# EAGLE board ARM_board_smd_layout (EAGLE 6.3), part 1 of 2
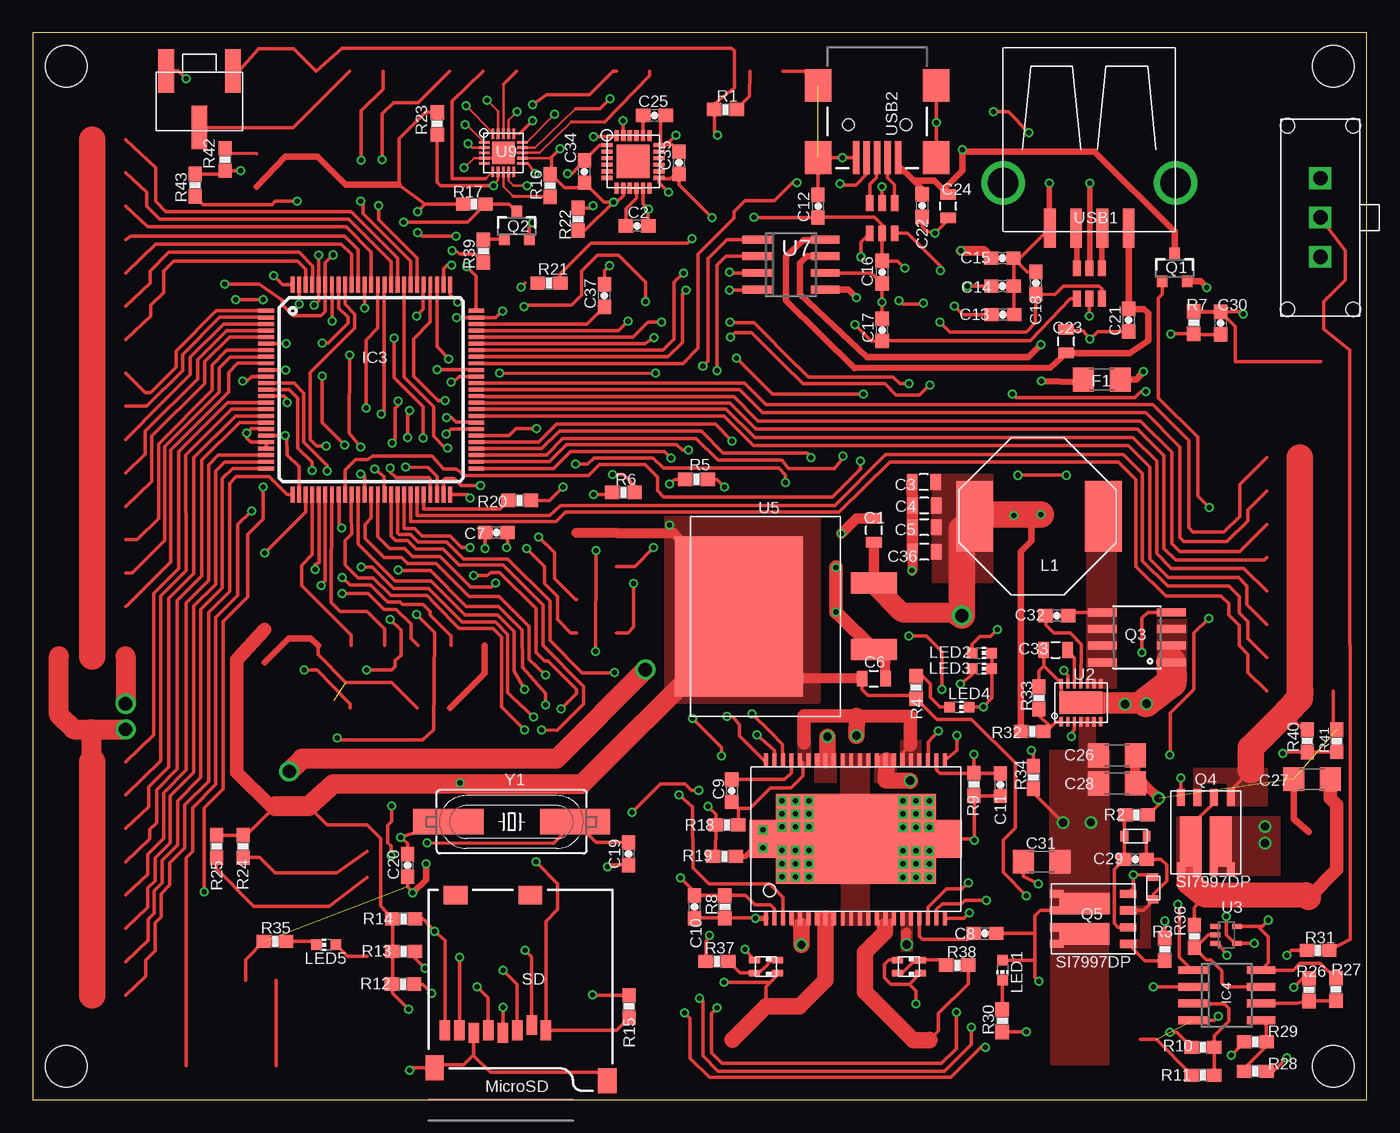
[diagram p0: board, top side]
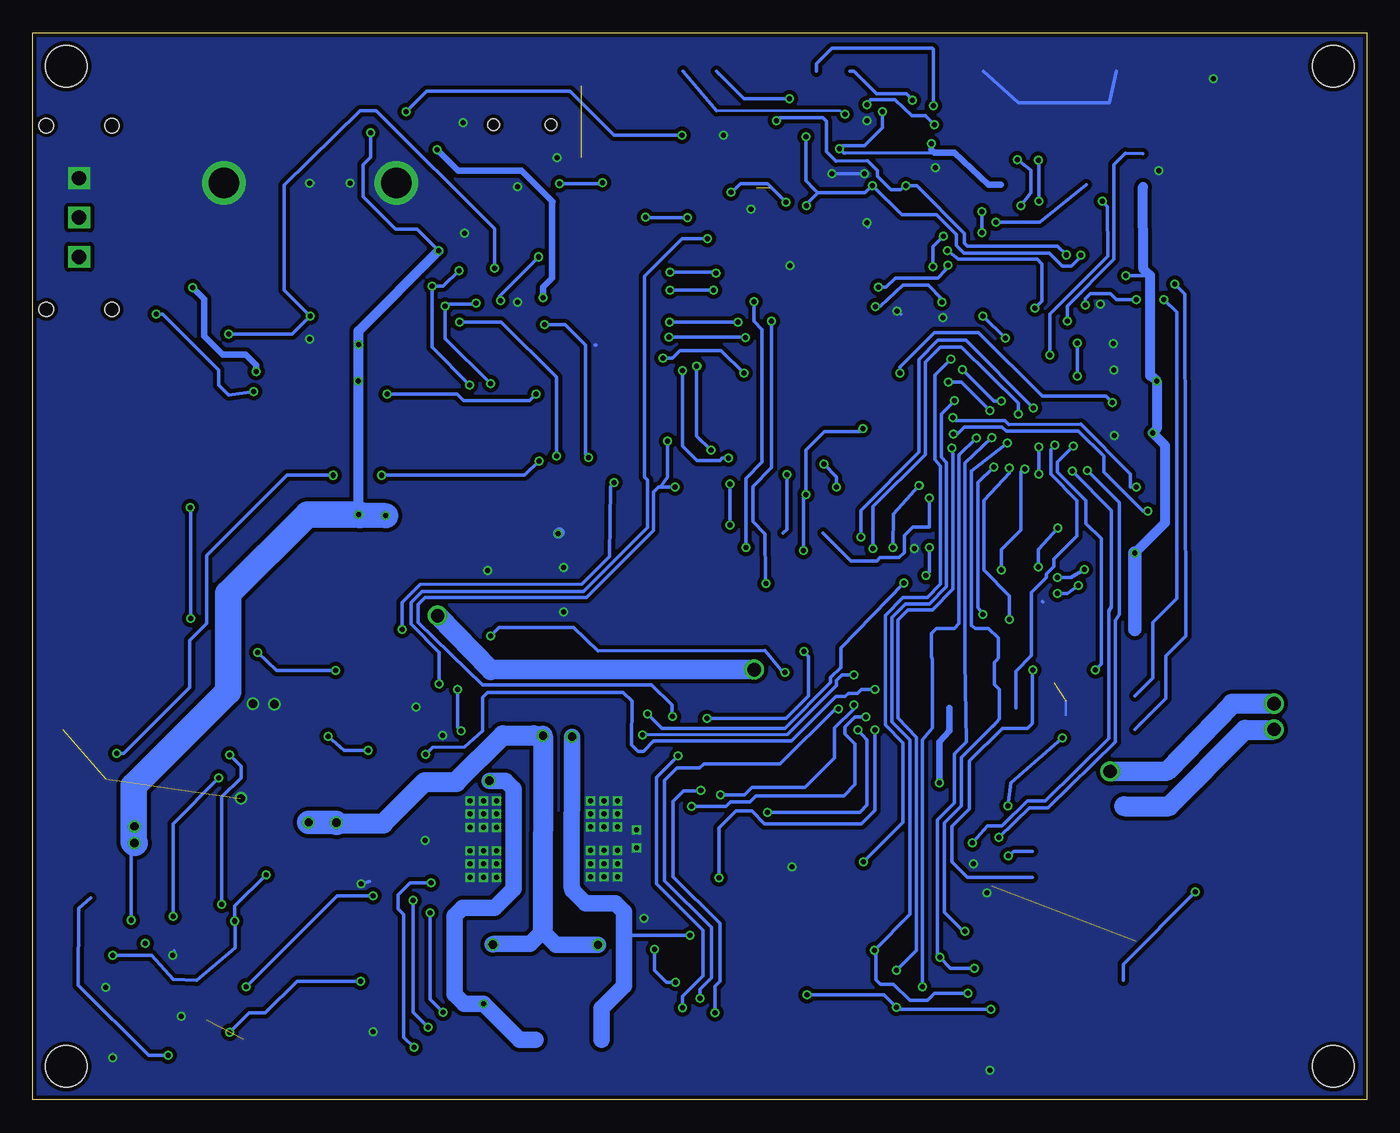
[diagram p1: board, bottom side, seen from below]

Size 101.6 x 81.28 mm. Coordinates in mm from the lower left corner, seen from the top.
Outline: 0,0 101.6,0 101.6,81.28 0,81.28 0,0
Copper layers (1*16): Top 0.035mm / dielectric 1.5mm / Bottom 0.035mm
Design rules "default": minimum track width 6mil, minimum drill 12mil, track to track 6mil, track to pad 6mil, pad to pad 6mil, via to via 6mil, smd to smd 0mil, copper to edge 10mil, drill to drill 10mil, minimum pad ring 10mil, minimum via ring 6mil, stop-mask expansion 2mil, vias tented up to drill 100mil, thermal gap 10mil
Holes 3.17 mm at 2.54,78.74 99.06,78.74 99.06,2.54 2.54,2.54

## Footprints (pad centres in the part's own frame; a part is rotated, then mirrored left to right if it is on the bottom)
0805 = smd 0.8 x 1.2: 1 -0.9,0; 2 0.9,0
0603-CAP = smd 1.1 x 1: 1 -0.85,0; 2 0.85,0
1206 = smd 1.6 x 1.8: 1 -1.4,0; 2 1.4,0
1206' = smd 1.6 x 1.8: 1 -0.13,2.54; 2 2.67,2.54
TQFP100 = smd 1.2 x 0.3: 1 -8,6; 2 -8,5.5; 3 -8,5; 4 -8,4.5; 5 -8,4; 6 -8,3.5; 7 -8,3; 8 -8,2.5; 9 -8,2; 10 -8,1.5; 11 -8,1; 12 -8,0.5; 13 -8,0; 14 -8,-0.5; 15 -8,-1; 16 -8,-1.5; 17 -8,-2; 18 -8,-2.5; 19 -8,-3; 20 -8,-3.5; 21 -8,-4; 22 -8,-4.5; 23 -8,-5; 24 -8,-5.5; 25 -8,-6; 51 8,-6; 52 8,-5.5; 53 8,-5; 54 8,-4.5; 55 8,-4; 56 8,-3.5; 57 8,-3; 58 8,-2.5; 59 8,-2; 60 8,-1.5; 61 8,-1; 62 8,-0.5; 63 8,0; 64 8,0.5; 65 8,1; 66 8,1.5; 67 8,2; 68 8,2.5; 69 8,3; 70 8,3.5; 71 8,4; 72 8,4.5; 73 8,5; 74 8,5.5; 75 8,6 | smd 0.3 x 1.2: 26 -6,-8; 27 -5.5,-8; 28 -5,-8; 29 -4.5,-8; 30 -4,-8; 31 -3.5,-8; 32 -3,-8; 33 -2.5,-8; 34 -2,-8; 35 -1.5,-8; 36 -1,-8; 37 -0.5,-8; 38 0,-8; 39 0.5,-8; 40 1,-8; 41 1.5,-8; 42 2,-8; 43 2.5,-8; 44 3,-8; 45 3.5,-8; 46 4,-8; 47 4.5,-8; 48 5,-8; 49 5.5,-8; 50 6,-8; 76 6,8; 77 5.5,8; 78 5,8; 79 4.5,8; 80 4,8; 81 3.5,8; 82 3,8; 83 2.5,8; 84 2,8; 85 1.5,8; 86 1,8; 87 0.5,8; 88 0,8; 89 -0.5,8; 90 -1,8; 91 -1.5,8; 92 -2,8; 93 -2.5,8; 94 -3,8; 95 -3.5,8; 96 -4,8; 97 -4.5,8; 98 -5,8; 99 -5.5,8; 100 -6,8
SO08 = smd 0.6 x 2.2: 1 -1.905,-2.6; 2 -0.635,-2.6; 3 0.635,-2.6; 4 1.905,-2.6; 5 1.905,2.6; 6 0.635,2.6; 7 -0.635,2.6; 8 -1.905,2.6
INDUCTOR = smd 2.8 x 5.4: P$1 0,0; P$2 9.8,0
CHIP-LED0603 = smd 0.8 x 0.8: A 0,-0.75; C 0,0.75
LED-0606 = smd 0.85 x 0.5: 1 0.875,0.5; 2 -0.875,0.5; 3 0.875,-0.5; 4 -0.875,-0.5
POT = smd 1.194 x 3.302: 1 -2.54,0; 2 0,4.318; 3 2.54,0
SOT23-3 = smd 0.8 x 0.9: 1 -0.95,-1; 2 0.95,-1; 3 0,1.1
SO08' = smd 0.61 x 2.21: 1 -1.905,-2.616; 2 -0.635,-2.616; 3 0.635,-2.616; 4 1.905,-2.616; 5 1.905,2.616; 6 0.635,2.616; 7 -0.635,2.616; 8 -1.905,2.616
POWERPAK = smd 1.27 x 0.61: 1 0,2.54; 2 0,1.27; 3 0,0; 4 0,-1.27 | smd 1.016 x 0.61: 5 5.461,-1.27; 6 5.461,0; 7 5.461,1.27; 8 5.461,2.54 | smd 3.81 x 1.651: 9 3.353,1.791; 10 3.353,-0.521
0603-RES = smd 1.1 x 1: 1 -0.85,0; 2 0.85,0
MICRO-SD-SOCKET-PP = smd 0.8 x 1.5: 1 -8.94,10.7; 2 -7.84,10.3; 3 -6.74,10.7; 4 -5.64,10.9; 5 -4.54,10.7; 6 -3.44,10.9; 7 -2.34,10.7; 8 -1.24,10.7 | smd 1.8 x 1.4: CD1 -2.05,0.4; CD2 -7.75,0.4 | smd 1.4 x 1.9: GND1 -13.6,14.55; GND3 -0.45,13.55
SW = drill 1.1 square: P$1 0,0; P$2 3,0; P$3 -3,0 | hole 1.1: -7,2.5; -7,-2.5; 7,-2.5; 7,2.5
HSOP44 = smd 1.05 x 0.3: P$1 -6.05,6.85; P$2 -6.05,6.2; P$3 -6.05,5.55; P$4 -6.05,4.9; P$5 -6.05,4.25; P$6 -6.05,3.6; P$7 -6.05,2.95; P$8 -6.05,2.3; P$9 -6.05,1.65; P$10 -6.05,1; P$11 -6.05,0.35; P$12 -6.05,-0.3; P$13 -6.05,-0.95; P$14 -6.05,-1.6; P$15 -6.05,-2.25; P$16 -6.05,-2.9; P$17 -6.05,-3.55; P$18 -6.05,-4.2; P$19 -6.05,-4.85; P$20 -6.05,-5.5; P$21 -6.05,-6.15; P$22 -6.05,-6.8; P$23 6,-6.8; P$24 6,-6.15; P$25 6,-5.5; P$26 6,-4.85; P$27 6,-4.2; P$28 6,-3.55; P$29 6,-2.9; P$30 6,-2.25; P$31 6,-1.6; P$32 6,-0.95; P$33 6,-0.3; P$34 6,0.35; P$35 6,1; P$36 6,1.65; P$37 6,2.3; P$38 6,2.95; P$39 6,3.6; P$40 6,4.25; P$41 6,4.9; P$42 6,5.55; P$43 6,6.2; P$44 6,6.85 | smd 6.85 x 12.2: P$45 0,0 | smd 2.9 x 2: P$46 0,7.1; P$47 0,-7.1
WDFN-14L = smd 0.25 x 0.7: 1 -1.5,-1.45; 2 -1,-1.45; 3 -0.5,-1.45; 4 0,-1.45; 5 0.5,-1.45; 6 1,-1.45; 7 1.5,-1.45; 8 1.5,1.45; 9 1,1.45; 10 0.5,1.45; 11 0,1.45; 12 -0.5,1.45; 13 -1,1.45; 14 -1.5,1.45 | smd 3.3 x 1.7: P$1 0,0
SC70 = smd 0.4 x 0.75: 1 -0.65,-0.825; 2 0,-0.825; 3 0.65,-0.825; 4 0.65,0.825; 5 -0.65,0.825
QFN-24_IMU = smd 0.838 x 0.318: 1 -1.975,1.25; 2 -1.975,0.75; 3 -1.975,0.25; 4 -1.975,-0.25; 5 -1.975,-0.75; 6 -1.975,-1.25; 13 1.975,-1.25; 14 1.975,-0.75; 15 1.975,-0.25; 16 1.975,0.25; 17 1.975,0.75; 18 1.975,1.25 | smd 0.318 x 0.838: 7 -1.25,-2.025; 8 -0.75,-2.025; 9 -0.25,-2.025; 10 0.25,-2.025; 11 0.75,-2.025; 12 1.25,-2.025; 19 1.25,1.975; 20 0.75,1.975; 21 0.25,1.975; 22 -0.25,1.975; 23 -0.75,1.975; 24 -1.25,1.975 | smd 2.54 x 2.54: DIE_PAD 0,0
D2PAK = smd 1.6 x 3.505: GND -2.54,-2.54; VIN 2.54,-2.54 | smd 12.192 x 9.754: VOUT 0,7.722
SOT23-6L = smd 1.2 x 0.6: P$1 -1.1,0.9; P$2 -1.1,-0.05; P$3 -1.1,-1; P$4 1.2,-1; P$5 1.2,-0.05; P$6 1.2,0.9
QFN-UT-20 = smd 0.203 x 0.787: P$1 0,-1.45; P$2 0.4,-1.45; P$3 0.8,-1.45; P$4 -0.4,-1.45; P$5 -0.8,-1.45; P$6 0,1.45; P$7 0.4,1.45; P$8 0.8,1.45; P$9 -0.4,1.45; P$10 -0.8,1.45 | smd 0.787 x 0.203: P$11 -1.45,0; P$12 -1.45,-0.4; P$13 -1.45,-0.8; P$14 -1.45,0.4; P$15 -1.45,0.8; P$16 1.45,0; P$17 1.45,-0.4; P$18 1.45,-0.8; P$19 1.45,0.4; P$20 1.45,0.8 | smd 1.7 x 1.7: P$21 0,0
USB-A-S = smd 3 x 0.9: D+ 3.45,-1; D- 3.45,1; GND 3.45,-3; VBUS 3.45,3 | drill 2.311: GND@1 0,6.566; GND@2 0,-6.566
USB-MINIB = smd 2.5 x 0.5: D+ 2.5,0; D- 2.5,0.8; GND 2.5,-1.6; ID 2.5,-0.8; VBUS 2.5,1.6 | smd 2.5 x 2: MTN1 -3,4.5; MTN2 2.5,4.5; MTN3 -3,-4.5; MTN4 2.5,-4.5 | hole 0.9: 0,2.2; 0,-2.2
HC49UP = smd 5.334 x 1.93: 1 -4.826,0; 2 4.826,0
0603 = smd 0.6 x 0.8: P$1 1.7,0; P$2 0,0

## Placement (x,y rotation side)
C1  10u  [0805]  64.06,43.38 90 top
C2  0.1u  [0603-CAP]  46.02,66.57 0 top
C3  22u  [0805]  67.87,47.07 180 top
C4  22u  [0805]  67.89,45.26 180 top
C5  22u  [0805]  67.89,43.61 180 top
C6  10u  [0805]  64.06,32.08 0 top
C7  2.2u  [0603-CAP]  35.31,43.21 0 top
C8  0.1u  [0603-CAP]  72.52,12.67 180 top
C9  0.1u  [0603-CAP]  53.24,23.55 270 top
C10  1u  [0603-CAP]  50.39,14.71 270 top
C11  1u  [0603-CAP]  73.71,24 270 top
C12  0.1u  [0603-CAP]  59.82,68.07 90 top
C13  47p  [0603-CAP]  73.89,59.82 0 top
C14  47p  [0603-CAP]  73.86,61.98 0 top
C15  0.1u  [0603-CAP]  73.84,64.11 0 top
C16  0.1u  [0603-CAP]  64.69,63.04 270 top
C17  47p  [0603-CAP]  64.69,58.65 90 top
C18  47p  [0603-CAP]  76.4,62.23 90 top
C19  22p  [0603-CAP]  45.36,18.75 270 top
C20  22p  [0603-CAP]  28.55,17.86 90 top
C21  0.1u  [0603-CAP]  83.46,59.39 270 top
C22  0.1u  [0603-CAP]  67.74,68.12 90 top
C23  10u  [0805]  78.71,57.78 90 top
C24  10u  [0805]  69.72,68.07 90 top
C25  2.2n  [0603-CAP]  47.35,74.98 0 top
C26  10u  [1206]  82.58,26.24 0 top
C27  22u  [1206]  97.43,24.43 180 top
C28  10u  [1206]  82.58,24.1 0 top
C29  0.1u  [0603-CAP]  83.97,18.31 180 top
C30  10n  [0603-CAP]  90.47,59.16 90 top
C31  22u  [1206]  76.83,18.14 180 top
C32  1u  [0603-CAP]  78,36.88 0 top
C33  10u  [0805]  77.9,34.26 0 top
C34  0.1uF  [0603-CAP]  42.01,70.71 90 top
C35  10n  [0603-CAP]  49.23,71.37 90 top
C36  22u  [0805]  67.89,41.76 180 top
C37  2.2u  [0603-CAP]  43.54,61.26 90 top
F1  POLYFUSE  [1206']  82.7,57.4 180 top
IC3  STM32F407VET  [TQFP100]  25.78,54.1 0 top
IC4  LM358D  [SO08]  90.96,7.98 270 top
L1  2.7u  [INDUCTOR]  81.53,44.45 180 top
LED1  RED  [CHIP-LED0603]  73.86,9.88 180 top
LED2  YELLOW  [CHIP-LED0603]  72.29,34.04 270 top
LED3  YELLOW  [CHIP-LED0603]  72.29,32.84 270 top
LED4  RED  [CHIP-LED0603]  70.59,29.92 270 top
LED5  YELLOW  [CHIP-LED0603]  22.35,11.81 90 top
LED6  LED_R/G  [LED-0606]  55.85,10.16 180 top
LED7  LED_R/G  [LED-0606]  66.73,10.16 180 top
POT  10K  [POT]  12.7,78.38 180 top
Q1  Si2301  [SOT23-3]  86.97,63.35 0 top
Q2  BC817  [SOT23-3]  36.86,66.55 0 top
Q3  FDS6670AS  [SO08']  84.1,35.23 90 top
Q4  SI7997DP  [POWERPAK]  88.7,23.04 270 top
Q5  SI7997DP  [POWERPAK]  83.44,14.43 180 top
R1  10  [0603-RES]  52.76,75.44 180 top
R2  100k  [0603-RES]  84.07,21.69 0 top
R3  100k  [0603-RES]  86.21,11.46 270 top
R4  220  [0603-RES]  67.28,31.42 270 top
R5  10k  [0603-RES]  50.55,47.27 180 top
R6  10k  [0603-RES]  44.98,46.28 180 top
R7  10k  [0603-RES]  88.42,59.21 270 top
R8  220  [0603-RES]  52.7,14.71 90 top
R9  220  [0603-RES]  71.68,24.03 90 top
R10  10k  [0603-RES]  89.13,4.01 180 top
R11  10k  [0603-RES]  89.13,1.88 0 top
R12  33k  [0603-RES]  28.19,8.81 0 top
R13  33k  [0603-RES]  28.24,11.3 0 top
R14  33k  [0603-RES]  28.24,13.79 0 top
R15  33k  [0603-RES]  45.42,7.11 90 top
R16  10k  [0603-RES]  39.4,69.65 90 top
R17  1k  [0603-RES]  33.63,68.22 0 top
R18  93.1k  [0603-RES]  52.88,20.95 180 top
R19  10k  [0603-RES]  52.68,18.54 0 top
R20  220  [0603-RES]  37.08,45.67 180 top
R21  220  [0603-RES]  39.32,62.2 180 top
R22  10k  [0603-RES]  41.53,67.08 270 top
R23  10k  [0603-RES]  30.81,74.37 90 top
R24  10k  [0603-RES]  16.03,19.3 90 top
R25  10k  [0603-RES]  14,19.3 90 top
R26  10k  [0603-RES]  97.21,8.38 270 top
R27  39k  [0603-RES]  99.26,8.41 90 top
R28  10k  [0603-RES]  93.12,2.18 0 top
R29  39k  [0603-RES]  93.12,4.42 0 top
R30  2k  [0603-RES]  73.84,6.02 90 top
R31  10k  [0603-RES]  97.89,11.38 0 top
R32  93.1k  [0603-RES]  76.12,28.07 180 top
R33  18k  [0603-RES]  76.63,30.61 270 top
R34  100k  [0603-RES]  76.23,24.56 270 top
R35  220  [0603-RES]  18.44,12.06 0 top
R36  10k  [0603-RES]  88.47,12.45 90 top
R37  2k  [0603-RES]  52.12,10.54 0 top
R38  2k  [0603-RES]  70.41,10.26 180 top
R39  1k  [0603-RES]  34.32,64.64 90 top
R40  93.1k  [0603-RES]  97.08,27.33 270 top
R41  10k  [0603-RES]  99.31,27.36 90 top
R42  10k  [0603-RES]  14.66,71.63 90 top
R43  10k  [0603-RES]  12.37,69.67 270 top
SD  USD-SOCKETNEW  [MICRO-SD-SOCKET-PP]  30.15,16 180 top
SW1  SW  [SW]  98.07,67.21 90 top
U1  MC33932  [HSOP44]  62.69,19.86 90 top
U2  RT7259  [WDFN-14L]  79.83,30.25 0 top
U3  NC7SZU04  [SC70]  90.91,12.57 270 top
U4  MPU-6050  [QFN-24_IMU]  45.72,71.48 0 top
U5  LD1086  [D2PAK]  61.52,36.83 90 top
U6  USBLC6-2  [SOT23-6L]  80.52,62.23 270 top
U7  LM3526  [SO08]  57.76,63.63 270 top
U8  USBLC6-2  [SOT23-6L]  64.74,67.21 270 top
U9  SX1505  [QFN-UT-20]  35.84,72.14 0 top
USB1  USB-A-S  [USB-A-S]  80.47,69.85 270 top
USB2  USB-MINIB-5PIN  [USB-MINIB]  64.31,74.27 270 top
Y1  24MHz  [HC49UP]  36.47,21.18 0 top
ZD1  15V  [0603]  84.84,20.09 180 top
ZD2  15V  [0603]  85.34,15.27 90 top

## Library data of the parts
C1-C37 Q1-Q3 R1-R43 SD U3 USB2 Y1 = SparkFun
F1 L1 LED6 LED7 POT Q4 Q5 SW1 U2 U4 U5 U9 ZD1 ZD2 = r_cubed
IC3 U1 U6-U8 = new_parts
IC4 = linear
LED1-LED5 = led
USB1 = con-usb-2

## Nets
5V: C1.1 C3.1 C4.1 C5.1 C15.1 C36.1 F1.2 IC4.8 L1.P$2 POT.1 Q4.7 Q4.8 Q4.9 R1.2 R27.2 R32.2 U3.5 U5.VIN U7.7
+3V3: C6.1 C12.1 C16.1 C30.1 C34.1 C35.1 IC3.11 IC3.19 IC3.21 IC3.22 IC3.28 IC3.50 IC3.75 IC3.100 IC4.2 R4.2 R5.2 R6.1 R7.2 R12.1 R13.1 R14.1 R15.2 R16.2 R17.1 R22.2 R23.2 R24.2 R25.2 SD.4 U4.8 U4.13 U5.VOUT U6.P$5 U8.P$5 U9.P$7 U9.P$14 U9.P$17
ANALOG0: IC3.26
ANALOG1: IC3.25
ANALOG2: IC3.24
ANALOG3: IC3.23
ANALOG4: IC3.18
ANALOG5: IC3.17
ANALOG6: IC3.16
ANALOG7: IC3.15
BAT_SENSE: IC3.33 R18.2 R19.1
BOOT0: IC3.94 R42.2
BOOT1: IC3.37 R43.2
BTN0: IC3.57
BTN1: IC3.58
BUZZER: IC3.89 R39.1
DIGITAL0: IC3.9
DIGITAL1: IC3.8
DIGITAL2: IC3.7
DIGITAL3: IC3.5
DIGITAL4: IC3.4
DIGITAL5: IC3.3
DIGITAL6: IC3.2
DIGITAL7: IC3.1
DIGITAL8: IC3.98
DIGITAL9: IC3.97
DIGITAL10: IC3.91
DIGITAL11: IC3.90
DIGITAL12: IC3.88
DIGITAL13: IC3.85
DIGITAL14: IC3.84
GND: C1.2 C2.2 C3.2 C4.2 C5.2 C6.2 C7.1 C10.2 C11.2 C12.2 C13.2 C14.2 C15.2 C16.2 C17.2 C18.2 C19.2 C20.1 C21.2 C22.1 C23.2 C24.1 C25.2 C26.2 C27.2 C28.2 C31.2 C33.1 C34.2 C35.2 C36.2 C37.2 IC3.6 IC3.10 IC3.20 IC3.27 IC3.74 IC3.99 IC4.4 LED2.C LED3.C LED4.C POT.3 Q2.2 Q3.1 Q3.2 Q3.3 R2.2 R8.1 R9.1 R11.1 R19.2 R26.1 R28.2 R30.1 R33.1 R35.1 R41.2 R42.1 R43.1 SD.6 SD.GND1 SD.GND3 SW1.P$2 U1.P$1 U1.P$10 U1.P$11 U1.P$12 U1.P$13 U1.P$23 U1.P$32 U1.P$33 U1.P$34 U1.P$35 U1.P$45 U1.P$46 U1.P$47 U2.14 U2.P$1 U3.3 U4.1 U4.9 U4.11 U4.18 U5.GND U6.P$2 U7.6 U8.P$2 U9.P$8 U9.P$12 U9.P$18 U9.P$21 USB1.GND USB1.GND@1 USB1.GND@2 USB2.GND USB2.MTN1 USB2.MTN2 USB2.MTN3 USB2.MTN4
I2C1_SCL: IC3.95 R23.1 U4.23 U9.P$4
I2C1_SDA: IC3.96 R22.1 U4.24 U9.P$2
I2C2_SCL/USART3_TX: IC3.47 R25.1
I2C2_SDA/USART3_RX: IC3.48 R24.1
LCD_E: IC3.81
LCD_RS: IC3.82
LED0: IC3.46 R20.2
LED1: R21.2
LED2: IC3.77
M1_A: IC3.38 U1.P$43
M1_B: IC3.39 U1.P$42
M1_EN: IC3.40 U1.P$3
M1_FAULT: IC3.55 R5.1 U1.P$44
M1_SENSE: C10.1 IC3.35 R8.2 U1.P$2
M2_A: IC3.41 U1.P$20
M2_B: IC3.43 U1.P$21
M2_EN: IC3.42 U1.P$25
M2_FAULT: IC3.56 R6.2 U1.P$22
M2_SENSE: C11.1 IC3.36 R9.2 U1.P$24
MPOWER: C8.1 C9.2 C26.1 C28.1 C31.1 LED1.A Q5.5 Q5.6 Q5.10 R10.2 R18.1 R34.2 U1.P$4 U1.P$5 U1.P$6 U1.P$17 U1.P$18 U1.P$26 U1.P$27 U1.P$28 U1.P$39 U1.P$40 U2.4 U2.5 U2.6
N$1: Q5.7 Q5.8 Q5.9
N$2: C29.2 Q5.2 R2.1 ZD1.P$1
N$3: C25.1 U4.20
N$4: C37.1 IC3.73
N$5: IC4.3 R10.1 R11.2
N$6: C2.1 U4.10
N$7: U8.P$1 USB2.D-
N$8: U8.P$3 USB2.D+
N$9: LED4.A R4.1
N$10: C32.2 L1.P$1 Q3.5 Q3.6 Q3.7 Q3.8 U2.8 U2.9 U2.10
N$11: C7.2 IC3.49
N$12: IC4.5 R28.1 R29.2
N$13: U6.P$3 USB1.D+
N$14: IC4.1 Q1.1
N$15: F1.1 Q1.2
N$16: U6.P$1 USB1.D-
N$17: R32.1 R33.2 U2.1
N$18: LED5.C R35.2
N$20: C33.2 U2.12
N$21: C21.1 C23.1 U7.8 USB1.VBUS
N$22: R31.2 SW1.P$1
N$23: C29.1 Q5.1 Q5.3 R3.2 ZD1.P$2 ZD2.P$2
N$25: C32.1 U2.11
N$26: IC4.6 R26.2 R27.1
N$27: IC4.7 R36.1 U3.2
N$28: Q2.3 R17.2
N$29: LED5.A
N$30: Q4.4 U3.4
N$31: POT.2
N$35: Q3.4 U2.13
N$42: LED2.A R20.1
N$43: LED3.A R21.1
N$44: R34.1 U2.3
N$46: C19.1 IC3.12 Y1.2
N$47: C20.2 IC3.13 Y1.1
N$48: LED1.C R30.2
N$49: C9.1 U1.P$41
N$50: C8.2 U1.P$19
N$51: LED6.1 LED6.4 R37.2
N$52: LED7.1 LED7.4 R38.2
N$54: R1.1
N$58: U9.P$5
N$60: U9.P$6
N$61: U9.P$9
N$62: U9.P$10
N$63: U9.P$15
N$64: U9.P$16
N$65: Q2.1 R39.2
N$68: Q5.4 R3.1 R31.1 ZD2.P$1
N$70: U9.P$19
N$71: U9.P$20
N$72: R16.1 U9.P$1
OTG_FS_DM: C14.1 IC3.70 U8.P$6
OTG_FS_DP: C13.1 IC3.71 U8.P$4
OTG_FS_FAULT: IC3.69 U7.3
OTG_FS_ID: IC3.67 USB2.ID
OTG_FS_VBUS: IC3.68 U7.4
OTG_HS_DM: C18.1 IC3.53 U6.P$6
OTG_HS_DP: C17.1 IC3.54 U6.P$4
OTG_HS_FAULT: IC3.51 U7.2
OTG_HS_VBUS: IC3.52 U7.1
OUT1: LED6.2 LED6.3 U1.P$7 U1.P$8 U1.P$9
OUT2: R37.1 U1.P$36 U1.P$37 U1.P$38
OUT3: LED7.2 LED7.3 U1.P$29 U1.P$30 U1.P$31
OUT4: R38.1 U1.P$14 U1.P$15 U1.P$16
RAW_SPWR: C27.1 Q4.2 Q4.5 Q4.6 Q4.10 R29.1 R36.2
RESET: C30.2 IC3.14 R7.1
SDIO_CK: IC3.80 SD.5
SDIO_CMD: IC3.83 SD.3
SDIO_D0: IC3.65 R13.2 SD.7
SDIO_D1: IC3.66 R14.2 SD.8
SDIO_D2: IC3.78 R15.1 SD.1
SDIO_D3: IC3.79 R12.2 SD.2
SERVO0: IC3.64
SERVO1: IC3.63
SERVO2: IC3.62
SERVO3: IC3.61
SERVO4: IC3.60
SERVO5: IC3.59
SERVO6: IC3.45
SERVO7: IC3.44
SERVO_SENSE: IC3.34 R40.2 R41.1
SPI1_MISO: IC3.31
SPI1_MOSI: IC3.32
SPI1_NSS: IC3.29
SPI1_SCK: IC3.30
SPWR: Q4.1 Q4.3 R40.1
SWDCLK: IC3.76
SWDIO: IC3.72
USART1_RX: IC3.93
USART1_TX: IC3.92
USART2_RX: IC3.87
USART2_TX: IC3.86
USB_5V: C22.2 C24.2 Q1.3 U7.5 USB2.VBUS